# Altium PCB Busmaster.PcbDoc
Units mm, origin at the board's own origin, x right, y up, seen from the top; angles counter-clockwise.
Board outline 45.4 x 39.25 mm, 2 copper layers (TL, BL), stack 0.872 mm thick; 53 components, 51 nets, 217 pads, 120 vias.
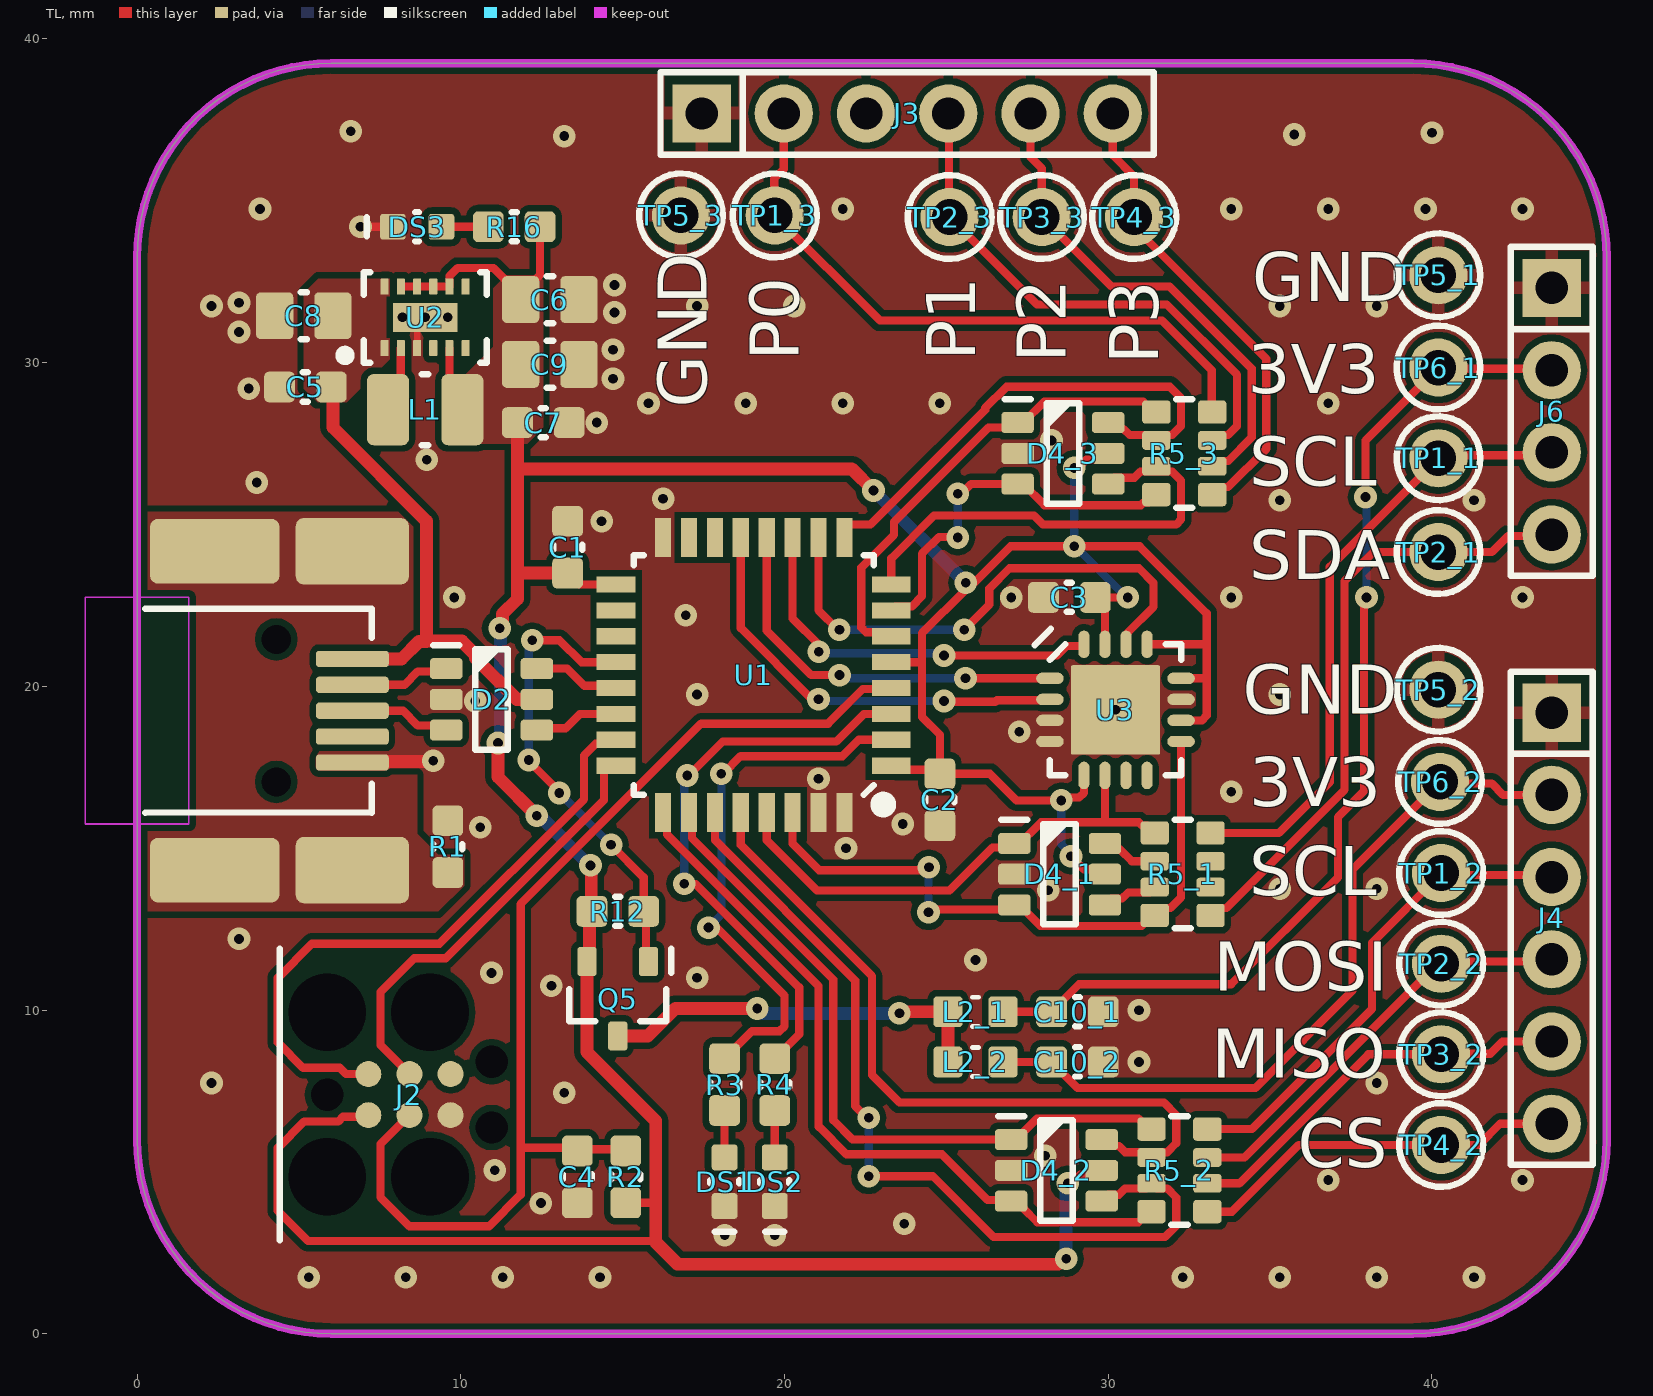
[diagram p0: TL view]
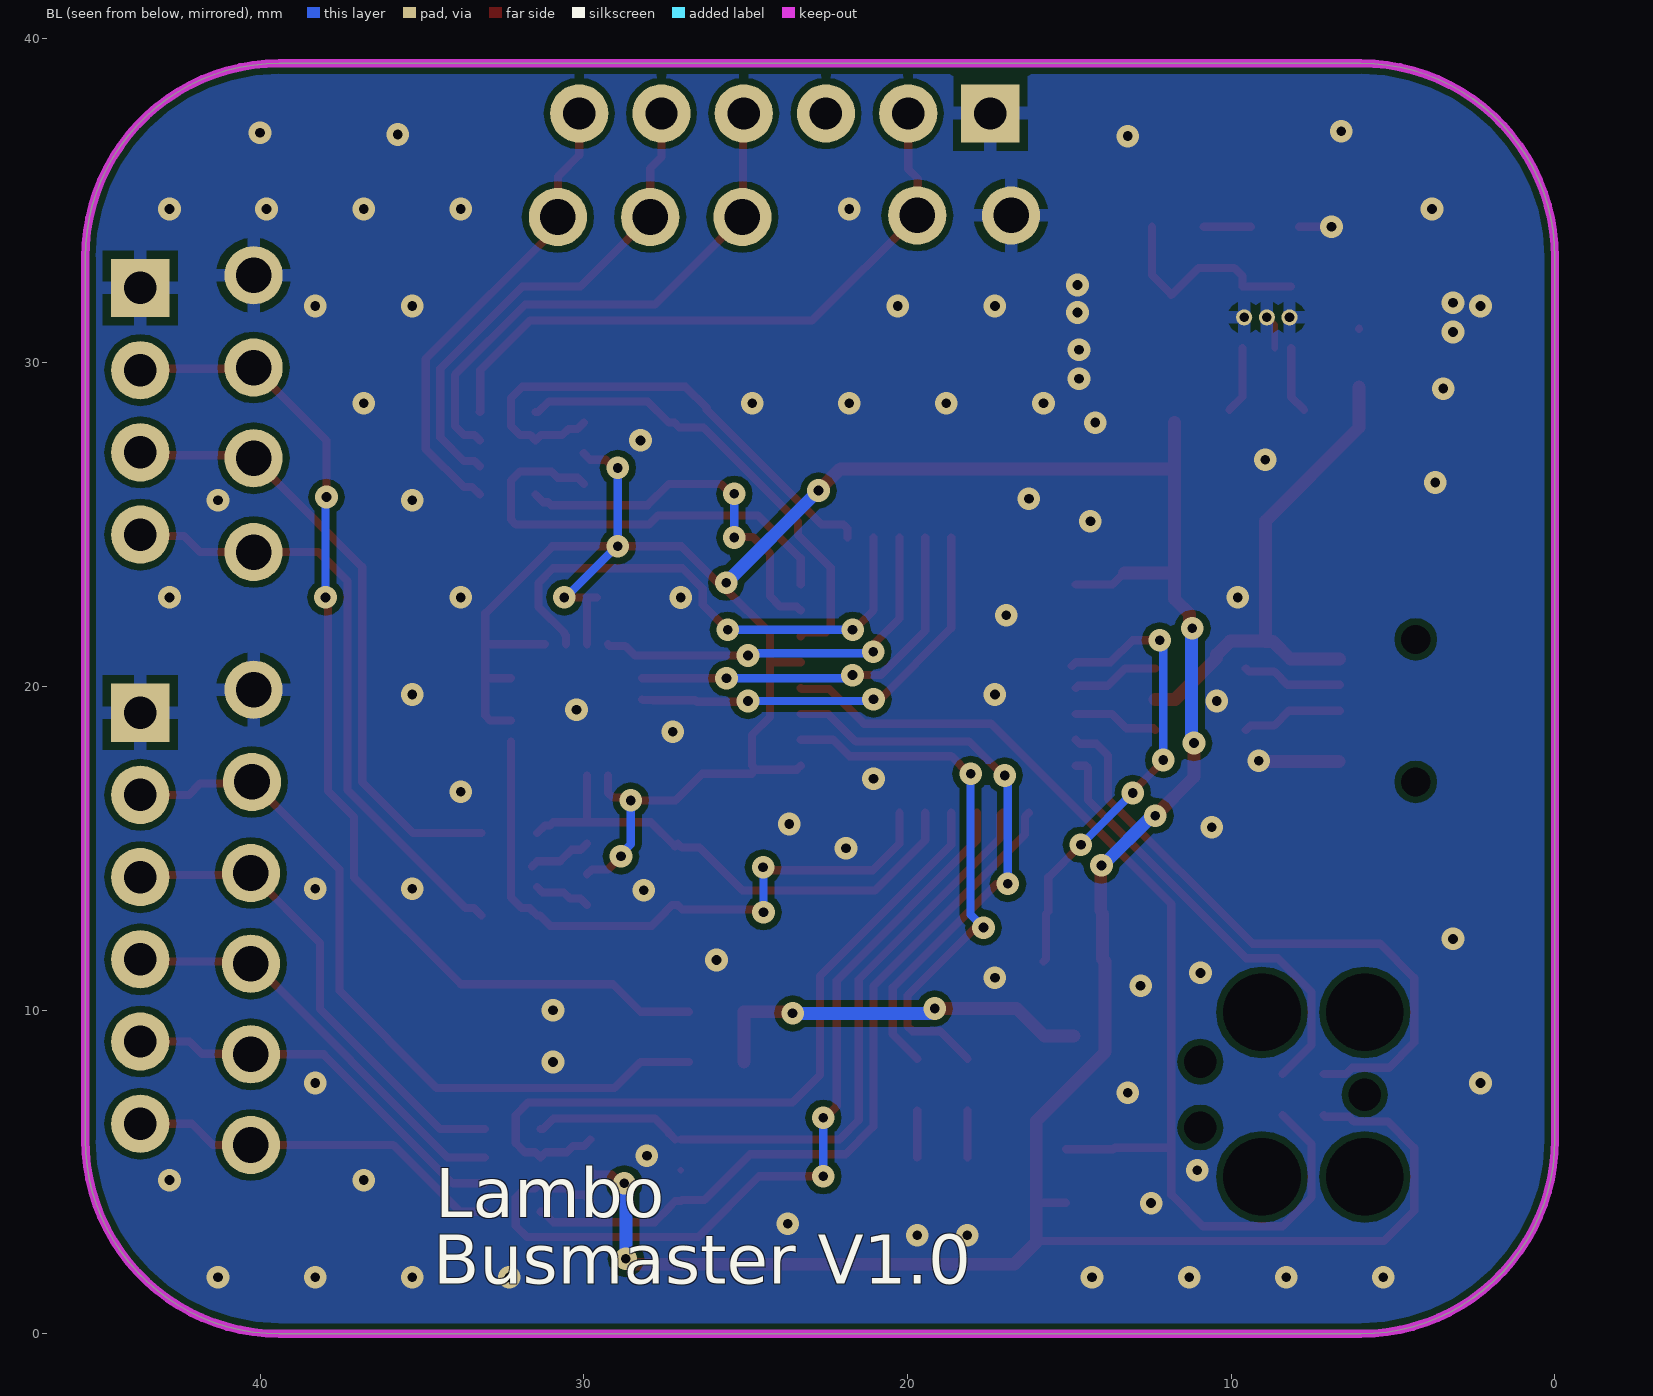
[diagram p1: BL view, seen from below]
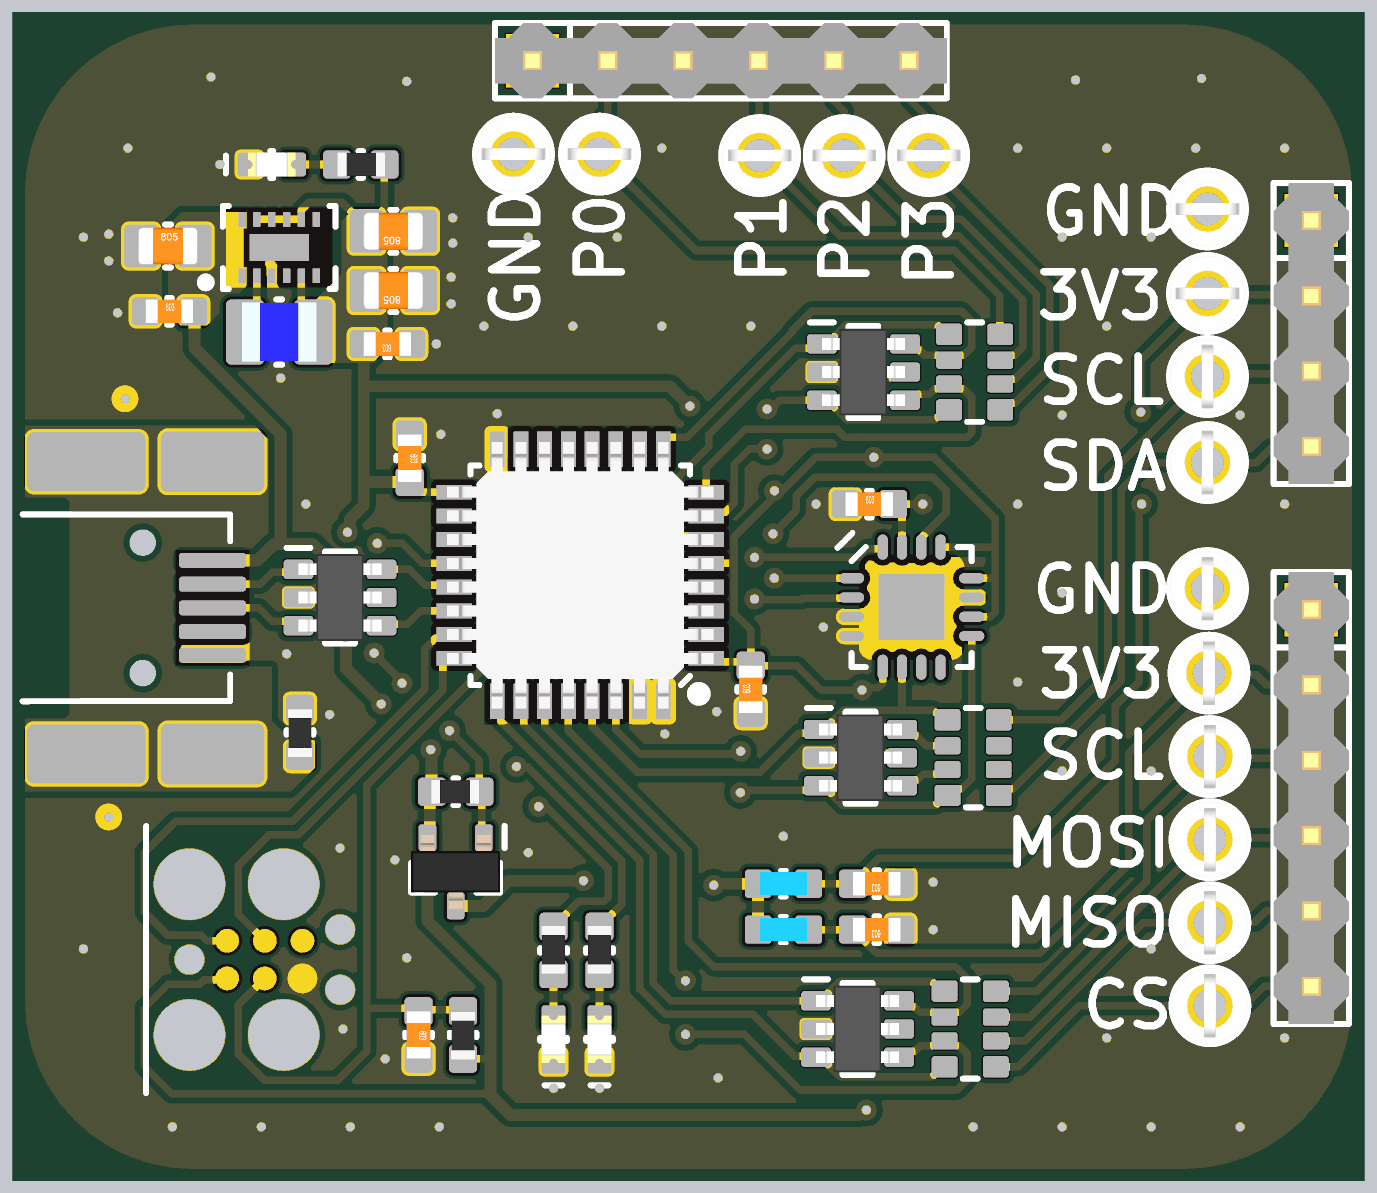
[diagram p2: 3D render of the assembled board from above, using the file's embedded part models]

## Layer stack, top to bottom
Top Solder: solder mask 0.01, Solder Resist, Dk 3.5
TL: signal copper 0.036
Dielectric 4: prepreg 0.8, FR-4, Dk 4.2
BL: signal copper 0.036
Bottom Solder: solder mask 0.01, Solder Resist, Dk 3.5

## Board outline
0,6 ccw(c6,6) 6,0 39.399,0 39.4,0.001 ccw(c39.4,6.001) 45.4,6.001 45.4,33.25 ccw(c39.4,33.25) 39.4,39.25 6,39.25 ccw(c6,33.25) 0,33.25

## Design rules (kind name [scope] priority, off if disabled: settings)
Clearance [All] p1: gap=0.2 ignorepadtopadclearanceinfootprint=FALSE except(0: Arc-Hole Track-Hole SMDPad-Hole THPad-Hole Via-Hole Fill-Hole Poly-Hole Region-Hole Text-Hole)
DiffPairsRouting DiffPairsRouting_1 [InDifferentialPair('D')] p1: maxlimit=0.4 minlimit=0.2 mostfreqgap=0.2 toplayer_minwidth=0.2 toplayer_maxwidth=0.4 toplayer_prefwidth=0.4 bottomlayer_minwidth=0.2 bottomlayer_maxwidth=0.4 bottomlayer_prefwidth=0.4 maxuncoupledlength=12.7
DiffPairsRouting [All] p2: maxlimit=0.254 minlimit=0.254 mostfreqgap=0.254 toplayer_minwidth=0.381 toplayer_maxwidth=0.381 toplayer_prefwidth=0.381 bottomlayer_minwidth=0.381 bottomlayer_maxwidth=0.381 bottomlayer_prefwidth=0.381 maxuncoupledlength=12.7
HoleSize [All] p1: absolutevalues=TRUE maxlimit=10 minlimit=0.3 maxpercent=80.000 minpercent=20.000
MinimumSolderMaskSliver MinimumSolderMaskSliver_1 [HasFootprint('QFN65P400X400X90_HS-16N')] p1: minsoldermaskwidth=0.08
MinimumSolderMaskSliver [All] p2: minsoldermaskwidth=0.1
PolygonConnect [All] p1: thpad.connectstyle=Relief thpad.reliefconductorwidth=0.4 thpad.reliefentries=4 thpad.polygonreliefangle="90 Angle" thpad.airgapwidth=0.254 smdpad.connectstyle=Direct smdpad.reliefconductorwidth=0.254 smdpad.reliefentries=4 smdpad.polygonreliefangle="90 Angle" smdpad.airgapwidth=0.254 via.connectstyle=Direct via.reliefconductorwidth=0.254 via.reliefentries=4 via.polygonreliefangle="90 Angle" via.airgapwidth=0.254
RoutingVias [All] p1: holewidth=0.3 width=0.7 viastyle="Through Hole" minholewidth=0.3 minwidth=0.5 maxholewidth=1 maxwidth=2
SilkToSilkClearance [All] p1: silktosilkclearance=0
SilkToSolderMaskClearance [IsPad] p1: minsilkscreentomaskgap=0.1 clearancetoexposedcopper=TRUE
SolderMaskExpansion [All] p1: expansion=0.102 istentingtop=FALSE
Width [All] p1: maxlimit=10 minlimit=0.2 preferedwidth=0.254
25 further rules are at their usual default settings.

## Classes and differential pairs
channel class IOProtection: IOProtection1 IOProtection2 IOProtection3 IOProtection4
component class IOProtection3: D4_3 R5_3 TP1_3 TP2_3 TP3_3 TP4_3 TP5_3
component class IOProtection2: C10_2 D4_2 L2_2 R5_2 TP1_2 TP2_2 TP3_2 TP4_2 TP5_2 TP6_2
component class IOProtection1: C10_1 D4_1 L2_1 R5_1 TP1_1 TP2_1 TP5_1 TP6_1
component class IOControl: C3 Q5 R12 U3
component class Busmaster: J3 J4 J6
component class USB: D2 R1
component class PSU: C5 C6 C7 C8 C9 DS3 L1 R16 U2
component class MCU: C1 C2 C4 DS1 DS2 J2 R2 R3 R4 U1

## Components (designator, comment, footprint, x,y, rotation, side; value= is the part's Value field where it differs from the comment)
C1 "100nF,50V" CAPC1608X09N_0603 13.3,24.3 r270 top
C2 "100nF,50V" CAPC1608X09N_0603 24.8,16.5 r90 top
C3 "100nF,50V" CAPC1608X09N_0603 28.8,22.75 r0 top
C4 "100nF,50V" CAPC1608X09N_0603 13.6,4.85 r270 top
C5 "100nF,50V" CAPC1608X09N_0603 5.2,29.25 r0 top
C6 "10uF,16V" CAPC2012X12N_0805 12.75,31.95 r180 top
C7 "100nF,50V" CAPC1608X09N_0603 12.55,28.15 r180 top
C8 "10uF,16V" CAPC2012X12N_0805 5.15,31.45 r0 top
C9 "10uF,16V" CAPC2012X12N_0805 12.75,29.95 r180 top
C10_1 "100nF,50V" CAPC1608X09N_0603 29.05,9.95 r180 top (schematic designator C10)
C10_2 "100nF,50V" CAPC1608X09N_0603 29.05,8.4 r180 top (schematic designator C10)
D2 "WE824" SOT95P280X145-6N_SOT23-6 10.95,19.6 r0 top
D4_1 "SRV05-4.TCT" SOT95P280X145-6N_SOT23-6 28.5,14.2 r0 top (schematic designator D4)
D4_2 "SRV05-4.TCT" SOT95P280X145-6N_SOT23-6 28.4,5.05 r0 top (schematic designator D4)
D4_3 "SRV05-4.TCT" SOT95P280X145-6N_SOT23-6 28.6,27.2 r0 top (schematic designator D4)
DS1 "GRN-0603" LED_SML-LX0603 18.15,4.7 r90 top
DS2 "GRN-0603" LED_SML-LX0603 19.7,4.7 r90 top
DS3 "GRN-0603" LED_SML-LX0603 8.65,34.2 r0 top
J2 "" TAG-CONNECT_TC2030-IDC 8.415,7.39 r0 top
J3 "FTDI SIP6" HIROSE_A2-6PA-2.54DSA 23.79,37.7 r90 top
J4 "HEADER 1X6" HIROSE_A2-6PA-2.54DSA 43.7,12.84 r0 top
J6 "HEADER 1X4" HIROSE_A2-4PA-2.54DSA 43.7,28.5 r0 top
L1 "4u7H, 1.1A" INDC2520X12N_1008 8.9,28.55 r0 top
L2_1 "100R" INDC1608X10N_0603 25.9,9.95 r0 top (schematic designator L2)
L2_2 "100R" INDC1608X10N_0603 25.9,8.4 r0 top (schematic designator L2)
Q5 "FDN336P" SOT95P230X110-3N_SOT23 14.85,10.35 r180 top
R1 "1M,1%" RESC1608X06N_0603 9.6,15.05 r270 top
R2 "10K,1%" RESC1608X06N_0603 15.1,4.85 r270 top
R3 "470R,1%" RESC1608X06N_0603 18.15,7.7 r90 top
R4 "470R,1%" RESC1608X06N_0603 19.7,7.7 r90 top
R5_1 "4x220R,5%" RESCAF80P32X16X60N 32.3,14.2 r0 top (schematic designator R5)
R5_2 "4x220R,5%" RESCAF80P32X16X60N 32.2,5.05 r0 top (schematic designator R5)
R5_3 "4x220R,5%" RESCAF80P32X16X60N 32.35,27.2 r0 top (schematic designator R5)
R12 "100K,1%" RESC1608X06N_0603 14.85,13.05 r180 top
R16 "470R,1%" RESC1608X06N_0603 11.65,34.2 r0 top
TP1_1 "5001-BLACK" TP_5002 40.2,27.05 r0 top (schematic designator TP1)
TP1_2 "5001-BLACK" TP_5002 40.283,14.235 r0 top (schematic designator TP1)
TP1_3 "5001-BLACK" TP_5002 19.7,34.55 r90 top (schematic designator TP1)
TP2_1 "5001-BLACK" TP_5002 40.2,24.15 r0 top (schematic designator TP2)
TP2_2 "5001-BLACK" TP_5002 40.283,11.435 r0 top (schematic designator TP2)
TP2_3 "5001-BLACK" TP_5002 25.1,34.5 r90 top (schematic designator TP2)
TP3_2 "5001-BLACK" TP_5002 40.283,8.635 r0 top (schematic designator TP3)
TP3_3 "5001-BLACK" TP_5002 27.95,34.5 r90 top (schematic designator TP3)
TP4_2 "5001-BLACK" TP_5002 40.283,5.835 r0 top (schematic designator TP4)
TP4_3 "5001-BLACK" TP_5002 30.8,34.5 r90 top (schematic designator TP4)
TP5_1 "5001-BLACK" TP_5002 40.2,32.7 r90 top (schematic designator TP5)
TP5_2 "5001-BLACK" TP_5002 40.2,19.9 r0 top (schematic designator TP5)
TP5_3 "5001-BLACK" TP_5002 16.8,34.55 r90 top (schematic designator TP5)
TP6_1 "5001-BLACK" TP_5002 40.2,29.85 r90 top (schematic designator TP6)
TP6_2 "5001-BLACK" TP_5002 40.25,17.05 r0 top (schematic designator TP6)
U1 "STM32L051K8T6" LQFP32 19.05,20.35 r180 top
U2 "TPS62745" R-PWSON-N12 8.9,31.4 r0 top
U3 "MCP4251T" QFN65P400X400X90_HS-16N 30.225,19.275 r0 top

## Footprints (in the part's own frame and the unit in brackets; to place one, negate y for a bottom-side part, rotate by r counter-clockwise, add the part's x,y. Pads: shape width x height; smd on the part's side, far side on the other; paste and mask are expansions set on the pad)
CAPC1608X09N_0603 [mm] "Chip Capacitor, 2-Leads, Body 1.6x0.8mm, IPC Medium Density"
  rrect32% 0.95x0.95 smd: 1(-0.8,0) 2(0.8,0)
  silkscreen extent -0.08,-0.45 0.08,0.45, body extent -0.8,-0.4 0.8,0.4, height 0.3
CAPC2012X12N_0805 [mm] "Chip Capacitor, 2-Leads, Body 2.0x1.2mm, IPC Medium Density"
  rrect26% 1.15x1.45 smd: 1(-0.9,0) 2(0.9,0)
  silkscreen extent -0.1,-0.72 0.1,0.72, body extent -1,-0.62 1,0.63, height 0.78
HIROSE_A2-4PA-2.54DSA [mm] "HEADER 0.1\" x4"
  rect 1.8x1.8 hole 1 mask+0.05: 1(0,3.81)
  round 1.8 hole 1 mask+0.05: 2(0,1.27) 3(0,-1.27) 4(0,-3.81)
  silkscreen extent -1.27,-5.08 1.27,5.08, body extent -1.27,-5.08 1.27,5.08, height 8.54
HIROSE_A2-6PA-2.54DSA [mm] "HEADER 0.1\" x6"
  rect 1.8x1.8 hole 1 mask+0.05: 1(0,6.35)
  round 1.8 hole 1 mask+0.05: 2(0,3.81) 3(0,1.27) 4(0,-1.27) 5(0,-3.81) 6(0,-6.35)
  silkscreen extent -1.27,-7.62 1.27,7.62, body extent -1.27,-7.62 1.27,7.62, height 8.54
INDC1608X10N_0603 [mm] "Chip Inductor, 2-Leads, Body 1.6x0.8mm, IPC Medium Density"
  rrect25% 0.9x0.95 smd: 1(-0.85,0) 2(0.85,0)
  silkscreen extent -0.1,-0.45 0.1,0.45, body extent -0.8,-0.4 0.8,0.4, height 1
INDC2520X12N_1008 [mm] "Chip Inductor, 2-Leads, Body 2.5x2.0mm, IPC Medium Density"
  rrect31% 1.3x2.2 smd: 1(-1.15,0) 2(1.15,0)
  silkscreen extent -0.1,-1.1 0.1,1.1, body extent -1.25,-1 1.25,1, height 1
LED_SML-LX0603 [mm] "Chip led, 2-Leads, Body 1.6x0.8mm, IPC Medium Density"
  rrect25% 0.8x0.8 smd: 1(-0.75,0) 2(0.75,0)
  silkscreen extent -1.55,-0.45 0.05,0.45, body extent -0.8,-0.4 0.8,0.4, height 0.63
LQFP32 [mm] "Low Profile Quad Flat Pack"
  rect 1.2x0.5 smd mask+0.175: 1(-4.25,2.8) 2(-4.25,2) 3(-4.25,1.2) 4(-4.25,0.4) 5(-4.25,-0.4) 6(-4.25,-1.2) 7(-4.25,-2) 8(-4.25,-2.8) 17(4.25,-2.8) 18(4.25,-2) 19(4.25,-1.2) 20(4.25,-0.4) 21(4.25,0.4) 22(4.25,1.2) 23(4.25,2) 24(4.25,2.8)
  rect 0.5x1.2 smd mask+0.175: 9(-2.8,-4.25) 10(-2,-4.25) 11(-1.2,-4.25) 12(-0.4,-4.25) 13(0.4,-4.25) 14(1.2,-4.25) 15(2,-4.25) 16(2.8,-4.25) 25(2.8,4.25) 26(2,4.25) 27(1.2,4.25) 28(0.4,4.25) 29(-0.4,4.25) 30(-1.2,4.25) 31(-2,4.25) 32(-2.8,4.25)
  silkscreen extent -4.2,-3.7 3.7,4.2, body extent -4.5,-4.5 4.5,4.5, height 1.63
QFN65P400X400X90_HS-16N [mm] "QFN, 16-Leads, Body 4.00x4.00mm, Pitch 0.65mm, Thermal Pad 2.76x2.81mm, IPC Medium Density"
  oval 0.85x0.35 smd: 1(-2.025,0.975) 2(-2.025,0.325) 3(-2.025,-0.325) 4(-2.025,-0.975) 9(2.025,-0.975) 10(2.025,-0.325) 11(2.025,0.325) 12(2.025,0.975)
  oval 0.35x0.85 smd: 5(-0.975,-2.025) 6(-0.325,-2.025) 7(0.325,-2.025) 8(0.975,-2.025) 13(0.975,2.025) 14(0.325,2.025) 15(-0.325,2.025) 16(-0.975,2.025)
  rrect4% 2.76x2.76 smd paste-0.267 mask+0.4: 17(0,0)
  silkscreen extent -2.5,-2.02 2.02,2.5, body extent -2.02,-2.02 2.02,2.02, height 0.9
R-PWSON-N12 [mm] "Plastic small outline no lead"
  rrect20% 0.25x0.5 smd paste+0: 1(-1.25,-0.95) 2(-0.75,-0.95) 3(-0.25,-0.95) 4(0.25,-0.95) 5(0.75,-0.95) 6(1.25,-0.95) 7(1.25,0.95) 8(0.75,0.95) 9(0.25,0.95) 10(-0.25,0.95) 11(-0.75,0.95) 12(-1.25,0.95)
  round 0.5 hole 0.3 mask+0.05: 13(-0.7,0) 13(0,0) 13(0.7,0)
  rect 2x0.9 smd paste+0: 13(0,0)
  silkscreen extent -2.62,-1.4 1.9,1.4, body extent -1.58,-1.05 1.52,1.05, height 0.7
RESC1608X06N_0603 [mm] "Chip Resistor, 2-Leads, Body 1.6x0.8mm, IPC Medium Density"
  rrect32% 0.95x0.95 smd: 1(-0.8,0) 2(0.8,0)
  silkscreen extent -0.08,-0.45 0.08,0.45, body extent -0.78,-0.4 0.82,0.4, height 0.4
RESCAF80P32X16X60N [mm]
  rrect28% 0.875x0.72 smd mask+0.05: 1(-0.863,1.275) 4(-0.863,-1.275) 5(0.862,-1.275) 8(0.863,1.275)
  rrect34% 0.875x0.58 smd mask+0.05: 2(-0.863,0.4) 3(-0.863,-0.4) 6(0.863,-0.4) 7(0.863,0.4)
  silkscreen extent -0.25,-1.68 0.25,1.68, body extent -0.87,-1.67 0.87,1.67, height 0.6
SOT95P230X110-3N_SOT23 [mm] "SOT23, 3-Leads, Body 3.0x2.5mm (max), Pitch 0.95mm, IPC Medium Density"
  rrect33% 0.6x0.9 smd: 1(-0.95,-1.15) 2(0.95,-1.15) 3(0,1.15)
  silkscreen extent -1.65,-1.55 1.5,0.7, body extent -1.5,-1.25 1.5,1.25, height 1.1
SOT95P280X145-6N_SOT23-6 [mm] "SOT23, 6-Leads, Body 3.1x2.8mm (max), Pitch 0.95mm, IPC Medium Density"
  rrect31% 1x0.65 smd mask+0.05: 1(-1.4,0.95) 2(-1.4,0) 3(-1.4,-0.95) 4(1.4,-0.95) 5(1.4,0) 6(1.4,0.95)
  silkscreen extent -1.8,-1.55 0.5,1.68, body extent -1.4,-1.46 1.4,1.46, height 1.4
TAG-CONNECT_TC2030-IDC [mm]
  round 0 hole 2.4: 0(-2.54,-2.54) 0(-2.54,2.54) 0(0.635,-2.54) 0(0.635,2.54)
  round 0.8 hole 1: 0(-2.54,0)
  round 0 hole 1: 0(2.54,-1.016) 0(2.54,1.016)
  round 0.8 smd paste-0.5: 1(-1.27,-0.635) 2(-1.27,0.635) 3(0,-0.635) 4(0,0.635) 5(1.27,-0.635) 6(1.27,0.635)
  silkscreen extent -4,-4.5 -4,4.5
TP_5002 [mm]
  round 1.8 hole 1.1: 1(0,0)
  silkscreen extent -1.29,-1.29 1.3,1.29, body extent -1.27,-1.27 1.27,1.27, height 4.89

## Part data
C1 C2 C3 C4 C5 C7 C10_1 C10_2: library part CCH-104CH-G, "CAP CER 0.1UF 50V 10% X7R 0603", Capacitance=100nF, Dielectric=X7R, Manufacturer=Kemet, Manufacturer Part Number=C0603C104K5RACTU, Supplier Part Number 1=399-5089-1-ND, Tolerance=10%, Voltage=50V, BWA PN=CCH-104CH-G, Display_Name=100nF,50V, Schematic Symbol=CAP-NP_1, Supplier 1=Digi-Key, Type=Ceramic
C6 C8 C9: library part CCI-106CD-G, "CAP CER 10µF ±10% 16V X7R 0805", Capacitance=10uF, Dielectric=X7R, Manufacturer="Samsung Electro-Mechanics America, Inc.", Manufacturer Part Number=CL21B106KOQNNNG, Supplier Part Number 1=1276-6472-1-ND, Tolerance=10%, Voltage=16V, BWA PN=CCI-106CD-G, Display_Name=10uF,16V, Schematic Symbol=CAP-NP_1, Supplier 1=Digi-Key, Type=Ceramic
D2: library part DIO-10181-A, "TVS DIODE 5VWM 7.7VC SOT23", Manufacturer="Wurth Electronics Inc", Manufacturer Part Number=82400102, Supplier Part Number 1=732-4473-1-ND, BWA PN=DIO-10181-A, Display_Name=WE824, Schematic Symbol=WE824, Supplier 1=Digi-Key, Type=TVS, Vr(max)=5V
D4_1 D4_2 D4_3: library part DIO-10080-A, "IC TVS ARRAY 4-LINE 5V SOT23-6", Manufacturer=Semtech, Supplier Part Number 1=SRV05-4CT-ND, BWA PN=DIO-10080-A, Display_Name=SRV05-4.TCT, Manufacturer Part Number=SRV05-4.TCT, Schematic Symbol=SRV05-4.TCT, Supplier 1=Digi-Key, Type=TVS
DS1 DS2 DS3: library part LED-10087-A, "LED GREEN CLEAR 0603 SMD", Colour=GREEN, Manufacturer=Dialight, Manufacturer Part Number=5988081107F, Supplier Part Number 1=350-2036-1-ND, Axial Intensity=300mcd, BWA PN=LED-10087-A, Display_Name=GRN-0603, If(max)=20mA, Lens Style/Size=0603, Lens type=clear, Schematic Symbol=LED_1, Supplier 1=Digi-Key, Vf@I=3.2V, Viewing Angle=140, Vr(max)=-, Wavelength=523nm
J2: library part NONPART-051, "Tag connect 6 way", BWA PN=NONPART-051, Schematic Symbol=TAGCON_TC2030-IDC
J3: library part CON-10749-A, "FTDI Serial Header", Manufacturer="Hirose Electric Co Ltd", Manufacturer Part Number=A2-6PA-2.54DSA(71), Supplier Part Number 1=H123043-ND, BWA PN=CON-10749-A, Contacts=6, Display_Name="FTDI SIP6", Pitch=2.54mm, Rows=1, Schematic Symbol=FTDI_TTL_232R, Supplier 1=Digi-Key, Type=Header
J4: library part CON-10040-A, "CONN 6-pin 2.54mm pitch TH single row", Manufacturer=Hirose, Manufacturer Part Number=A2-6PA-2.54DSA, BWA PN=CON-10040-A, Contacts=6, Display_Name="HEADER 1X6", Pitch=2.54mm, Rows=1, Schematic Symbol=HIROSE_A2-6PA-2.54DSA, Type=HEADER
J6: library part CON-10039-A, "CONN 4-pin 2.54mm pitch TH single row", Manufacturer=Hirose, Manufacturer Part Number=A2-4PA-2.54DSA, BWA PN=CON-10039-A, Contacts=4, Display_Name="HEADER 1X4", Pitch=2.54mm, Rows=1, Schematic Symbol=HIROSE_A2-4PA-2.54DSA
L1: library part IND-10165-A, "INDUCTOR POWER 4.7UH 1.1A SMD", Current Rating=1.1A, DC Resistance=276mOhm, Inductance=4u7H, Manufacturer="Murata Electronics North America", Manufacturer Part Number=DFE252010R-H-4R7M=P2, Supplier Part Number 1=490-10646-1-ND, BWA PN=IND-10165-A, Display_Name="4u7H, 1.1A", Schematic Symbol=INDUCTOR_1, Sheilding=Unsheilded, Supplier 1=Digi-Key, Type=Wirewound
L2_1 L2_2: library part IND-10168-A, "FERRITE BEAD 100 OHM 0603 1LN", Current Rating=2000mA, DC Resistance=45mOhm, Inductance="100Ohm @ 100 MHz", Manufacturer=Murata, Manufacturer Part Number=BLM18EG101TN1D, Supplier Part Number 1=490-5978-1-ND, BWA PN=IND-10168-A, Display_Name=100R, Schematic Symbol=INDUCTOR_1, Supplier 1=Digi-Key
Q5: library part TRN-10046-A, "MOSFET P-Channel", Manufacturer="Fairchild Semiconductor", Supplier Part Number 1=FDN336PCT-ND, BWA PN=TRN-10046-A, Display_Name=FDN336P, Id(max)=1.3A, Manufacturer Part Number=FDN336P, rds(on)="200 mOhm @ 1.3A, 4.5V", Schematic Symbol=MOSFET-P_1, Supplier 1=Digi-Key, Type=P, Vds(max)=20V, Vgs(max)=+/-8V, Vth(max)="1.5V @ 250µA"
R1: library part RSH-1M000-D, "RES 1.00M OHM 1/10W 1% 0603 SMD", Manufacturer=Yageo, Manufacturer Part Number=RC0603FR-071ML, Power=0.1W, Resistance=1M, Supplier Part Number 1=311-1.00MHRCT-ND, Tolerance=1%, BWA PN=RSH-1M000-D, Display_Name=1M,1%, Schematic Symbol=RESISTOR_1, Supplier 1=Digi-Key, Type=Chip
R2: library part RSH-10K00-D, "RES 10.0K OHM 1/10W 1% 0603 SMD", Manufacturer=Yageo, Manufacturer Part Number=RC0603FR-0710KL, Power=0.1W, Resistance=10K, Supplier Part Number 1=311-10.0KHRCT-ND, Tolerance=1%, BWA PN=RSH-10K00-D, Display_Name=10K,1%, Schematic Symbol=RESISTOR_1, Supplier 1=Digi-Key, Type=Chip
R3 R4 R16: library part RSH-470R0-D, "RES 470 OHM 1/10W 1% 0603 SMD", Manufacturer="Rohm Semiconductor", Manufacturer Part Number=MCR03EZPFX4700, Power=0.1W, Resistance=470R, Supplier Part Number 1=RHM470HCT-ND, Tolerance=1%, BWA PN=RSH-470R0-D, Display_Name=470R,1%, Schematic Symbol=RESISTOR_1, Supplier 1=Digi-Key, Type=Chip
R5_1 R5_2 R5_3: library part RAB-200R0-F, "RES ARRAY 220 OHM 8TRM 4 RES SMD", Manufacturer=Yageo, Manufacturer Part Number=YC164-JR-07220RL, Resistance=220R, Supplier Part Number 1=YC164J-220CT-ND, Tolerance=5%, BWA PN=RAB-200R0-F, Display_Name=4x220R,5%, Schematic Symbol=RESISTOR_ARRAY_4X, Supplier 1=Digi-Key, Type=Array
R12: library part RSH-100K0-D, "RES 100K OHM 1/10W 1% 0603 SMD", Manufacturer=Yageo, Manufacturer Part Number=RC0603FR-07100KL, Power=0.1W, Resistance=100K, Supplier Part Number 1=311-100KHRCT-ND, Tolerance=1%, BWA PN=RSH-100K0-D, Display_Name=100K,1%, Schematic Symbol=RESISTOR_1, Supplier 1=Digi-Key, Type=Chip
TP1_1 TP1_2 TP1_3 TP2_1 TP2_2 TP2_3 TP3_2 TP3_3 TP4_2 TP4_3 TP5_1 TP5_2 TP5_3 TP6_1 TP6_2: library part CON-10768-A, "PC TEST LOOP BLACK", Manufacturer="Keystone Electronics", Manufacturer Part Number=5000, Supplier Part Number 1=36-5001-ND, BWA PN=CON-10768-A, Contacts=1, Display_Name=5001-BLACK, Rows=1, Schematic Symbol=TP_1, Supplier 1=Digi-Key, Type=Testpoint
U1: library part ICT-10696-A, "32 Bit Mcirocontroler", Manufacturer="ST Microelectronics", Supplier Part Number 1=497-14901-ND, Temp Range="-40°C ~ 85°C", BWA PN=ICT-10696-A, Display_Name=STM32L051K8T6, Manufacturer Part Number=STM32L051K8T6, Schematic Symbol=STM32L051x6/8, Supplier 1=Digi-Key
U2: library part ICT-10699-A, "Step Down Converter", Manufacturer="Texas Instruments", Supplier Part Number 1=296-44339-1-ND, Temp Range="-40°C ~ 85°C", BWA PN=ICT-10699-A, Display_Name=TPS62745, Manufacturer Part Number=TPS62745, Schematic Symbol=TPS62745, Supplier 1=Digi-Key, Supplier 2="Element 14", Supplier Part Number 2=2498474
U3: library part ICT-10921-A, "IC DGTL POT 10KOHM 257TAP 16QFN", Manufacturer="Microchip Technology", Manufacturer Part Number=MCP4251T-103E/ML, Supplier Part Number 1=MCP4251T-103E/MLCT-ND, Temp Range="-40°C ~ 125°C", BWA PN=ICT-10921-A, Display_Name=MCP4251T, Schematic Symbol=MCP4241T-103E, Supplier 1=Digi-Key

## Free pads (board coordinates)
  rrect40% 2.25x0.5 smd: 1(6.65,20.85) 2(6.65,20.05) 3(6.65,19.25) 4(6.65,18.45) 5(6.65,17.65)
  rrect24% 3.5x2.05 smd: A(6.65,24.175) B(6.65,14.325)
  rrect24% 4x2 smd: C(2.4,24.175) D(2.4,14.325)
  round 0 hole 0.9 unplated: ""(4.3,17.05) ""(4.3,21.45)

## Via types
v1: diameter 0.7, hole 0.3, TL to BL, tented both sides, 118 vias
v2: diameter 0.7, hole 0.3, TL to BL, 2 vias

## Nets (pads, with @x,y where several pads share a name; then routed paths per layer and width w, separated by ;. In a path a pad name is that pad's centre, name@x,y a point inside that pad or via, vN(x,y) a via of type N, cw(c..) or ccw(c..) an arc to the next point about the centre after c; other vN are vias at no path point)
3V3: C1.2 C2.2 C3.2 C6.2 C7.2 C9.2 D4_1.5 D4_2.5 D4_3.5 J2.1 L1.2 Q5.2 R2.2 R12.2 R16.2 U1.1 U1.5 U1.17 U2.5 U2.8 U2.9 U2.10 U2.11 U3.5 U3.10 U3.12 U3.13 U3.15 | length 131
  TL w0.254: J2.1 7.099,6.709 6.364,6.709 6.218,6.563 5.163,6.563 4.348,5.748 4.348,3.802 5.281,2.869 15.813,2.869 ; U2.11 U2.10 U2.9 U2.8 9.652,32.352 9.652,32.675 9.904,32.927 11.011,32.927 C6.2@11.85,32.088 ; U2.5 9.652,30.448 9.652,28.948 L1.2 ; v1(11.2,21.8) v1@11.285,21.885 ; 11.75,23.534 11.784,23.5 ; C6.2@11.85,32.112 12.45,32.712 R16.2 ; C1.2 13.314,23.5 13.664,23.15 U1.17 ; Q5.2 Q5.2@13.975,11.575 ; R12.2@13.975,12.975 R12.2 R12.2@14.03,13.07 ; v1(14.01,14.471) v1@14.03,14.451 ; R2.2 16.005,4.05 16.022,4.032 ; U1.1 23.423,17.427 24.673,17.427 24.8,17.554 24.8,18.507 24.25,19.057 24.25,20.757 ; U1.5 24.243,20.75 24.25,20.757 ; C2.2 26.35,17.3 27.171,16.479 v1(28.55,16.479) 28.635,16.564 29.101,16.564 29.25,16.713 U3.5 ; v1(28.75,4.65) 28.871,4.65 29.137,4.916 29.666,4.916 D4_2.5 ; v1(28.85,14.75) 29.252,14.348 29.752,14.348 D4_1.5 ; v1(28.95,26.75) 29.071,26.75 29.323,27.002 29.802,27.002 D4_3.5 ; C3.2 v1(30.6,22.75) ; U3.15 C3.2@29.9,22.65 ; U3.13 33.042,21.3 ; U3.10 32.893,18.95 33.042,19.099 33.042,20.25 ; U3.12 33.042,20.25 ; 24.25,20.757 24.25,21.65 25.6,23 v1(25.6,23.2) 25.858,23.2 26.985,24.327 v1(28.95,24.327) 30.973,24.327 33.042,22.258 33.042,21.3 ; 33.042,20.25 33.042,21.3
  TL w0.4: v1(11.15,18.25) 11.15,17.2 v1(12.343,16.007) ; v1@11.285,21.885 11.285,22.235 11.75,22.7 11.75,23.534 11.75,26.722 ; C7.2 11.75,26.722 ; 11.784,23.5 C1.2 ; Q5.2 13.9,8.7 16.022,6.578 16.022,4.032 16.022,2.828 16.7,2.15 28.452,2.15 28.619,2.317 v1(28.7,2.317) ; Q5.2@13.975,11.575 R12.2@13.975,12.975 ; R12.2@14.03,13.07 v1@14.03,14.451 ; v1(22.75,26.05) 22.078,26.722 11.75,26.722
  BL w0.254: v1(11.15,18.25) v1@11.227,18.327 ; v1(12.343,16.007) v1@12.443,16.007 ; v1@13.979,14.471 v1(14.01,14.471) ; v1(28.55,16.479) 28.55,15.122 28.85,14.822 v1(28.85,14.75) ; v1@28.7,4.6 v1(28.75,4.65) ; v1(28.95,26.75) v1(28.95,24.327) 28.986,24.327 30.563,22.75 v1(30.6,22.75)
  BL w0.4: v1@11.227,18.327 v1@11.227,21.773 ; v1@12.443,16.007 v1@13.979,14.471 ; v1(22.75,26.05) v1(25.6,23.2) ; v1(28.7,2.317) v1@28.7,4.6
3V3_OUT: L2_1.1 L2_2.1 Q5.3 | length 12.2
  TL w0.254: v1(23.55,9.9) v1@23.6,9.95
  TL w0.4: Q5.3 15.777,9.2 16.627,10.05 v1(19.162,10.05) ; v1@23.6,9.95 L2_1.1 L2_2.1
  BL w0.254: v1(19.162,10.05) v1@19.312,9.9
  BL w0.4: v1@19.312,9.9 v1(23.55,9.9)
5V: C5.2 C8.2 D2.5 pad.1 U2.1 U2.12 | length 15.6
  TL w0.4: C5.2@6.05,29.25 6.05,28 8.943,25.107 8.943,21.592 ; pad.1 8.17,20.85 8.714,21.394 8.943,21.394 ; 8.943,21.4 10.032,21.4 10.45,20.982 10.45,20.878 11.728,19.6 D2.5
GND: C1.1 C2.1 C3.1 C4.2 C5.1 C6.1 C7.1 C8.1 C9.1 C10_1.1 C10_2.1 D2.2 D4_1.2 D4_2.2 D4_3.2 DS1.1 DS2.1 DS3.1 J2.5 J3.1 J4.1 J6.1 pad.5 R1.1 TP5_1.1 TP5_2.1 TP5_3.1 U1.16 U1.31 U1.32 U2.3 U2.13 U3.3 U3.4 U3.11 U3.17 | length 4.6
  TL w0.2: pad.5 pad.5@6.675,17.675 ; U2.3 8.65,31.15 U2.13@8.9,31.4 ; v1@9.125,17.675 v1(9.15,17.7)
  TL w0.254: v1(6.9,34.2) DS3.1
  TL w0.4: pad.5@6.675,17.675 v1@9.125,17.675
  other v1: 5.3,1.75 8.3,1.75 11.3,1.75 14.3,1.75 32.3,1.75 35.3,1.75 38.3,1.75 41.3,1.75 18.15,3.05 19.7,3.05 23.7,3.4 12.475,4.04 36.8,4.75 42.8,4.75 11.05,5.05 28.05,5.5 13.2,7.45 2.3,7.75 38.3,7.75 30.95,8.4 30.95,10 12.8,10.75 17.3,11 10.95,11.15 25.9,11.55 28.15,13.7 35.3,13.75 38.3,13.75 21.9,15 10.6,15.65 23.65,15.75 33.8,16.75 21.05,17.15 27.25,18.6 30.225,19.275 10.45,19.55 17.3,19.75 35.3,19.75 16.95,22.2 27.004,22.746 9.8,22.75 33.8,22.75 42.8,22.75 14.35,25.1 35.3,25.75 41.3,25.75 16.25,25.8 8.95,27 28.25,27.6 14.2,28.15 15.8,28.75 18.8,28.75 21.8,28.75 24.8,28.75 36.8,28.75 3.45,29.2 14.7,29.5 14.7,30.4 3.15,30.95 14.75,31.55 2.3,31.75 17.3,31.75 20.3,31.75 35.3,31.75 38.3,31.75 3.15,31.85 14.75,32.4 3.8,34.75 21.8,34.75 33.8,34.75 36.8,34.75 39.8,34.75 42.8,34.75 13.2,37 35.75,37.05 40,37.1 6.6,37.15
  other v2: 3.15,12.2 3.7,26.3
NetC10_3_2: 
NetD2_1: D2.1 pad.2 | length 3.1
  TL w0.254: pad.2 8.262,20.05 8.669,20.458 9.457,20.458 D2.1
NetD2_3: D2.3 pad.3 | length 3.1
  TL w0.254: pad.3 8.212,19.25 8.669,18.793 9.407,18.793 D2.3
NetD2_4: D2.4 U1.22 | length 2.7
  TL w0.254: D2.4 12.405,18.705 13.231,18.705 13.676,19.15 U1.22
NetD2_6: D2.6 U1.21 | length 2.7
  TL w0.254: D2.6 13.287,20.55 13.819,20.018 14.733,20.018 U1.21
NetD4_1_1: D4_1.1 R5_1.1 U1.29 U3.6 | length 15.9
  TL w0.254: U1.29 19.45,15.25 21,13.7 25.1,13.7 26.427,15.027 26.977,15.027 D4_1.1 ; D4_1.1@27.188,15.063 27.927,15.802 29.857,15.802 ; U3.6 29.9,15.845 29.857,15.802 ; R5_1.1 31.204,15.708 31.046,15.708 30.952,15.802 29.857,15.802
NetD4_1_3: D4_1.3 R5_1.4 U1.30 U3.9 | length 20.2
  TL w0.254: U1.30 20.25,15.142 21.069,14.323 24.373,14.323 v1(24.462,14.412) ; v1(24.45,13.023) 24.535,13.108 26.958,13.108 D4_1.3 27.275,13.25 27.473,13.052 27.473,13.027 27.902,12.598 31.033,12.598 R5_1.4@31.36,12.925 ; R5_1.4 31.67,13.158 31.927,13.158 32.25,13.48 U3.9
  BL w0.254: v1(24.45,13.023) 24.45,14.4 v1(24.462,14.412)
NetD4_1_4: D4_1.4 R5_1.3 | length 1.8
  TL w0.254: D4_1.4 30.098,13.448 30.43,13.448 30.619,13.637 31.274,13.637 R5_1.3
NetD4_1_6: D4_1.6 R5_1.2 | length 2
  TL w0.254: D4_1.6 30.098,14.952 30.376,14.952 30.729,14.6 R5_1.2 R5_1.2@31.6,14.437
NetD4_2_1: D4_2.1 R5_2.1 U1.26 | length 21.7
  TL w0.254: U1.26 17.14,16.01 17.14,15.31 21.506,10.944 21.506,6.599 22.105,6 D4_2.1 ; D4_2.1@27.175,6 27.373,6.198 27.373,6.223 27.802,6.652 30.933,6.652 31.26,6.325 R5_2.1
NetD4_2_3: D4_2.3 R5_2.4 U1.25 | length 23.3
  TL w0.254: U1.25 16.373,15.977 16.373,15.427 21.052,10.748 21.052,6.398 21.065,6.398 21.917,5.546 24.861,5.546 26.275,4.132 26.968,4.132 D4_2.3 27.175,4.1 27.373,3.902 27.373,3.883 27.808,3.448 30.933,3.448 31.26,3.775 R5_2.4
NetD4_2_4: D4_2.4 R5_2.3 U1.27 | length 27.2
  TL w0.254: U1.27 17.85,15.25 22.183,10.917 22.183,7.04 22.546,6.677 v1(22.6,6.677) ; v1(22.6,4.869) 24.581,4.869 26.456,2.994 31.757,2.994 32.102,3.339 32.102,4.211 31.826,4.487 31.501,4.487 R5_2.3 31.175,4.487 30.519,4.487 30.33,4.298 29.998,4.298 D4_2.4
  BL w0.254: v1(22.6,4.869) v1(22.6,6.677)
NetD4_2_6: D4_2.6 R5_2.2 U1.28 | length 23.3
  TL w0.254: U1.28 18.65,15.1 22.7,11.05 22.7,8 23.556,7.144 31.719,7.144 32.102,6.761 32.102,5.889 31.826,5.613 31.501,5.613 R5_2.2 31.175,5.613 30.519,5.613 30.33,5.802 29.998,5.802 D4_2.6
NetD4_3_1: D4_3.1 R5_3.1 U1.6 | length 14.5
  TL w0.254: U1.6 23.177,21.673 22.522,21.673 22.373,21.822 22.373,23.672 23.383,24.683 23.383,25.084 26.301,28.002 27.052,28.002 D4_3.1 27.375,28.15 28.027,28.802 31.083,28.802 31.41,28.475 R5_3.1
NetD4_3_3: D4_3.3 R5_3.4 U1.7 | length 11.8
  TL w0.254: U1.7 23.423,22.473 23.935,22.473 24.25,22.788 24.25,24.1 24.769,24.619 25.331,24.619 v1(25.35,24.6) ; v1(25.35,25.954) 25.471,25.954 25.767,26.25 D4_3.3 27.375,26.25 28.027,25.598 31.014,25.598 31.108,25.692 31.254,25.692 R5_3.4
  BL w0.254: v1(25.35,24.6) v1(25.35,25.954)
NetD4_3_4: D4_3.4 R5_3.3 U1.8 | length 14.2
  TL w0.254: U1.8 23.3,23.957 24.62,25.277 27.706,25.277 27.979,25.004 32.103,25.004 32.252,25.153 32.252,26.361 31.976,26.637 31.488,26.637 30.999,26.637 30.81,26.448 30.198,26.448 D4_3.4
NetD4_3_6: D4_3.6 R5_3.2 U1.9 | length 16.2
  TL w0.254: U1.9 21.85,24.877 21.973,25 22.657,25 26.2,28.543 26.2,28.6 26.856,29.256 31.907,29.256 32.252,28.911 32.252,28.039 31.976,27.763 31.651,27.763 R5_3.2 31.325,27.763 30.665,27.763 30.476,27.952 30.198,27.952 D4_3.6
NetDS1_2: DS1.2 R3.1 | length 1.5
  TL w0.254: DS1.2 R3.1
NetDS2_2: DS2.2 R4.1 | length 1.5
  TL w0.254: DS2.2 R4.1@19.7,6.9
NetDS3_2: DS3.2 R16.1 | length 1.4
  TL w0.254: DS3.2 R16.1
NetJ1_A: pad.A pad.B pad.C pad.D R1.2
NetJ3_2: J3.2 R5_3.8 TP1_3.1 | length 20.1
  TL w0.254: J3.2 19.98,35.98 19.682,35.682 19.682,34.568 22.95,31.3 31.666,31.3 33.2,29.766 33.2,28.488 R5_3.8
NetJ3_4: J3.4 R5_3.7 TP2_3.1 | length 16.6
  TL w0.254: J3.4 25.08,37.68 25.08,34.52 27.8,31.8 31.808,31.8 33.977,29.631 33.977,28.039 33.701,27.763 33.376,27.763 R5_3.7
NetJ3_5: J3.5 R5_3.6 TP3_3.1 | length 15.5
  TL w0.254: J3.5 27.6,36.35 27.95,36 TP3_3.1 30.1,32.35 31.9,32.35 34.431,29.819 34.431,27.686 33.708,26.963 33.376,26.963 R5_3.6
NetJ3_6: J3.6 R5_3.5 TP4_3.1 | length 14.6
  TL w0.254: J3.6 30.14,36.41 30.8,35.75 TP4_3.1 30.8,34.2 34.885,30.115 34.885,27.34 33.703,26.158 33.446,26.158 R5_3.5
NetJ4_2: C10_2.2 J4.2 L2_2.2 TP6_2.1 | length 23.6
  TL w0.254: L2_2.2 C10_2.2 29.052,7.598 34.548,7.598 37.55,10.6 37.55,14.35 TP6_2.1 40.3,17 41.85,17 42.2,16.65 J4.2
NetJ4_3: J4.3 R5_2.8 TP1_2.1 | length 15.2
  TL w0.254: R5_2.8 34.441,6.325 38.15,10.034 38.15,12.08 40.283,14.213 TP1_2.1 40.345,14.173 43.637,14.173 J4.3
NetJ4_4: J4.4 R5_2.7 TP2_2.1 | length 13.2
  TL w0.254: R5_2.7 34.208,5.45 40.193,11.435 TP2_2.1 40.35,11.503 43.633,11.503 J4.4
NetJ4_5: J4.5 R5_2.6 TP3_2.1 | length 12.5
  TL w0.254: R5_2.6 34.05,4.65 38.035,8.635 TP3_2.1 40.298,8.65 41.8,8.65 42.18,9.03 J4.5
NetJ4_6: J4.6 R5_2.5 TP4_2.1 | length 11.8
  TL w0.254: R5_2.5 33.825,3.775 35.885,5.835 TP4_2.1 41.453,5.835 42.108,6.49 J4.6
NetJ6_2: C10_1.2 J6.2 L2_1.2 TP6_1.1 | length 32.7
  TL w0.254: L2_1.2 C10_1.2 29.1,10.8 33.8,10.8 37.096,14.096 37.096,15.959 37.9,16.763 37.9,22.673 v1(37.977,22.75) ; v1(37.95,25.85) 37.95,27.6 TP6_1.1 40.24,29.81 43.66,29.81 J6.2
  BL w0.254: v1(37.95,25.85) 37.977,25.823 v1(37.977,22.75)
NetJ6_3: J6.3 R5_1.8 TP1_1.1 | length 19.3
  TL w0.254: R5_1.8 35.271,15.475 36.846,17.05 36.846,23.696 40.29,27.14 43.61,27.14 J6.3
NetJ6_4: J6.4 R5_1.5 TP2_1.1 | length 19.2
  TL w0.254: R5_1.5 33.395,13.158 33.652,13.158 37.3,16.805 37.3,23.25 38.2,24.15 TP2_1.1 41.85,24.15 42.35,24.65 43.66,24.65 J6.4
NetL1_1: L1.1 U2.2 | length 2.1
  TL w0.254: L1.1 8.148,28.948 8.148,30.448 U2.2
NetL2_3_1: 
NetQ5_1: Q5.1 R12.1 U1.20 | length 14.4
  TL w0.254: v1(12.1,17.725) 12.1,17.7 13.043,16.757 v1(13.043,16.707) ; v1(12.207,21.425) 13.054,21.425 13.729,20.75 U1.20 U1.20@14.923,20.627 ; v1(14.644,15.11) 15.65,14.103 R12.1 ; R12.1@15.725,12.975 15.725,11.575 Q5.1
  BL w0.254: v1(12.1,17.725) 12.1,21.318 v1(12.207,21.425) ; v1(13.043,16.707) v1(13.043,16.707) 14.642,15.11 v1(14.644,15.11)
NetR3_2: R3.2 U1.2 | length 17.1
  TL w0.254: v1(17.65,12.55) 17.67,12.57 17.88,12.57 20,10.45 20,9.5 19.85,9.35 19,9.35 R3.2 ; v1(18.05,17.3) 18.1,17.3 18.646,17.846 21.788,17.846 22.292,18.35 U1.2
  BL w0.254: v1(17.65,12.55) 18.05,12.95 v1(18.05,17.3)
NetR4_2: R4.2 U1.3 | length 17.9
  TL w0.254: v1(16.9,13.9) 17.258,13.9 20.454,10.704 20.454,9.254 R4.2 ; v1(17,17.25) 17.043,17.25 18.093,18.3 21.6,18.3 22.45,19.15 U1.3
  BL w0.254: v1(16.9,13.9) 16.9,17.15 v1(17,17.25)
NetR5_1_6: R5_1.6
NetR5_1_7: R5_1.7 U1.18
NetU1_10: U1.10 U1.19 U3.14 | length 16.3
  TL w0.254: U1.10 21.05,22.35 21.649,21.751 v1(21.696,21.751) ; v1(25.55,21.75) 26.327,22.527 26.327,23.027 26.95,23.65 30.95,23.65 31.4,23.2 31.4,22.46 30.598,21.658 30.598,21.624 30.55,21.576 U3.14
  BL w0.254: v1(21.696,21.751) v1@25.499,21.751
NetU1_11: U1.11 U3.16 | length 12.3
  TL w0.254: U1.11 20.25,22.1 21.062,21.288 21.062,21.077 v1(21.059,21.074) ; v1(24.927,20.953) 28.42,20.953 28.718,21.25 29.206,21.25 29.206,21.256 U3.16
  BL w0.254: v1(21.059,21.074) 21.105,21.027 24.852,21.027 v1(24.927,20.953)
NetU1_12: U1.12 U3.1 | length 12.2
  TL w0.254: U1.12 19.45,21.725 20.825,20.35 v1(21.7,20.35) ; v1(25.593,20.25) U3.1
  BL w0.254: v1(21.7,20.35) 21.8,20.25 v1(25.593,20.25)
NetU1_13: U1.13 U3.2 | length 13.3
  TL w0.254: U1.13 18.65,21.8 20.85,19.6 v1(21.05,19.6) ; v1(24.927,19.55) 24.952,19.525 26.513,19.525 26.563,19.575 27.857,19.575 27.864,19.582 28.182,19.582 U3.2
  BL w0.254: v1(21.05,19.6) 21.1,19.55 v1(24.927,19.55)
NRST: C4.1 J2.3 R2.1 U1.4 | length 34.5
  TL w0.254: J2.3 7.523,5.863 7.523,4.218 8.418,3.323 10.873,3.323 11.85,4.3 11.85,5.75 ; R2.1@15.1,5.7 13.65,5.7 13.6,5.75 11.85,5.75 ; U1.4 23.268,19.918 22.418,19.918 21.35,18.85 17.427,18.85 11.85,13.273 11.85,5.75
SWCLK: J2.4 U1.24 | length 13.7
  TL w0.254: J2.4 7.523,8.917 7.523,10.563 8.56,11.6 9.535,11.6 14.421,16.487 14.421,17.489 14.483,17.55 U1.24
SWDIO: J2.2 U1.23 | length 19.5
  TL w0.254: J2.2 6.459,8.025 6.454,8.025 6.262,8.217 5.133,8.217 4.348,9.002 4.348,10.998 5.404,12.054 9.346,12.054 13.804,16.511 13.804,17.866 14.165,18.227 14.677,18.227 U1.23
pads on no net: J2.0 J2.6 J3.3 U1.14 U1.15 U2.4 U2.6 U2.7 U3.7 U3.8

## Polygon pours and split planes (outlines as drawn)
GND on TL "GND_L01_P004" (solid, pour order 4): 41.881,0 3.485,0 0,3.548 0,15.75 1.6,15.75 1.6,22.75 0,22.75 0,35.73 3.092,38.822 5.679,39.25 41.885,39.25 45.4,35.735 45.4,3.519
NetJ1_A on TL "NETJ1_A_L01_P000" (solid, pour order 0): 0,15.75 1.6,15.75 1.6,22.75 0,22.75 0,25.4 8.65,25.4 8.65,15.45 9.3,14.8 10.1,14.8 10.1,13.85 9.3,13.05 0,13.05
3V3 on TL "3V3_L01_P003" (solid, pour order 3): 12.4,32.7 12.55,32.55 12.55,28 12.05,27.5 10.1,27.5 10.1,29.6 11,30.5 11,32.3 11.4,32.7
5V on TL "5V_L01_P002" (solid, pour order 2): 5.574,28.776 5.15,29.2 5.15,32.15 5.6,32.6 7.8,32.6 7.8,30.1 6.476,28.776
no net on Top Solder "NONET_L01_P-001" (solid): 5.4,21.2 5.4,17.3 7.9,17.3 7.9,21.2
no net on Top Solder "NONET_L01_P-001" (solid): 7.1,30.1 7.15,30.05 10.7,30.05 10.7,32.75 7.1,32.75
GND on BL "GND_L02_P007" (solid, pour order 7): 41.881,0 3.485,0 0,3.548 0,15.75 0,22.75 0,35.73 3.092,38.822 5.679,39.25 41.885,39.25 45.4,35.735 45.4,3.519

## Keep-outs
TL:
  lines w0.05: -1.6,15.75 1.6,15.75 1.6,22.75 -1.6,22.75 -1.6,15.75
Keep-Out Layer:
  the board outline again, w0.254

## Silkscreen, mask and mechanical layers (free items; w line width, h text height)
Top Overlay:
  lines w0.2: 0.25,16.1 7.25,16.11 ; 0.25,22.4 7.25,22.398 ; 7.25,16.104 7.25,16.115 7.25,16.133 7.25,16.159 7.25,16.223 7.25,16.3 7.25,17 ; 7.25,21.5 7.25,22.2 7.25,22.277 7.25,22.341 7.25,22.367 7.25,22.385 7.25,22.396 7.25,22.4
  text "GND" at 34.454,31.904 h1.52
  text "P0" at 20.446,30.054 h1.52 r90
  text "P1" at 25.896,30.054 h1.52 r90
  text "P2" at 28.696,30.004 h1.52 r90
  text "P3" at 31.546,29.954 h1.52 r90
  text "3V3" at 34.304,29.054 h1.52
  text "GND" at 17.596,28.604 h1.52 r90
  text "SCL" at 34.354,26.204 h1.52
  text "SDA" at 34.354,23.304 h1.52
  text "GND" at 34.154,19.154 h1.52
  text "3V3" at 34.354,16.304 h1.52
  text "SCL" at 34.354,13.554 h1.52
  text "MOSI" at 33.254,10.604 h1.52
  text "MISO" at 33.204,7.904 h1.52
  text "CS" at 35.854,5.154 h1.52
Bottom Overlay:
  text "Lambo" at 34.596,3.604 h1.52
  text "Busmaster V1.0" at 34.646,1.554 h1.52
Mechanical 13:
  lines w0.05: 6.5,15.515 6.5,15.605 6.5,15.716 6.5,15.842 6.5,15.926 6.5,16.012 6.5,16.1 ; 6.5,15.8 7.4,15.8 7.4,15.4 -1.6,15.4 -1.6,15.605 -1.6,16.1 ; 6.5,18 6.5,16.1 ; 6.5,20.5 6.5,22.4 ; 6.5,22.7 7.4,22.7 7.4,23.1 -1.6,23.1 -1.6,22.895 -1.6,22.4 ; 6.5,23.051 6.5,22.985 6.5,22.895 6.5,22.785 6.5,22.658 6.5,22.532 6.5,22.4 ; 7.2,15.4 7.2,15.8 ; 7.2,22.7 7.2,23.1 ; -1.6,16.1 -1.6,22.4 ; -1.6,16.1 6.5,16.1 ; -1.6,22.4 6.5,22.4 ; 6.85,16.3 7.25,16.3 ; 6.85,16.3 6.85,22.2 ; 6.85,16.3 6.85,16.159 6.85,16.1 7.25,16.1 7.25,16.115 7.25,16.159 7.25,16.189 7.25,16.223 7.25,16.26 7.25,16.3 ; 6.85,22.2 7.25,22.2 ; 6.85,22.2 6.85,22.341 6.85,22.4 7.25,22.4 7.25,22.396 7.25,22.385 7.25,22.367 7.25,22.341 7.25,22.277 7.25,22.2 ; 7.25,16.3 7.25,22.2
Centers:
  lines w0.05: 3.8,19.25 4.8,19.25 ; 4.3,18.75 4.3,19.75
Courtyards:
  lines w0.05: -1.85,15.15 -1.85,23.35 0.15,23.35 0.15,25.425 8.65,25.425 8.65,13.075 0.15,13.075 0.15,15.15 -1.85,15.15
Designators:
  text ".Designator" at 4.014,22.167 h0.8 r270
MechOutline (Mech31):
  the board outline again, w0.2